# EAGLE board ESP32Avio (EAGLE 9.6.2)
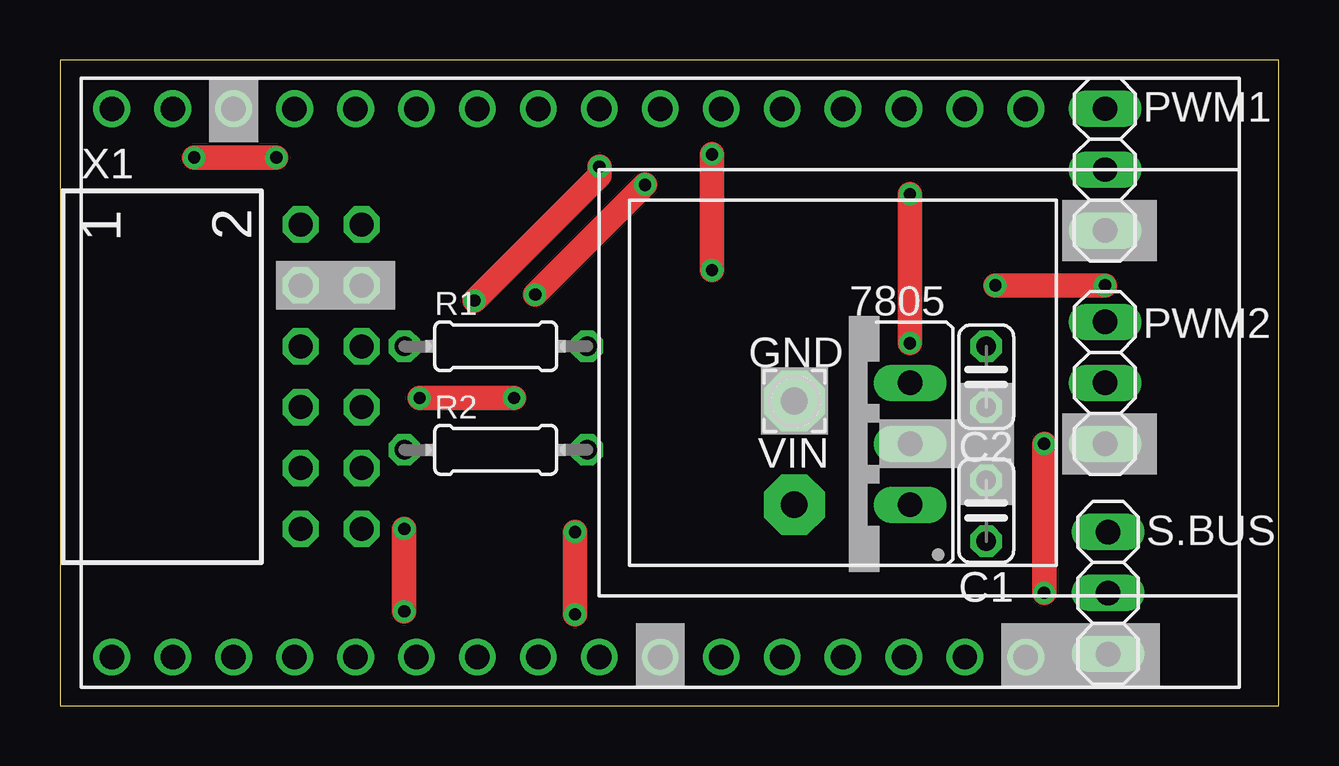
[diagram p0: board, top side]
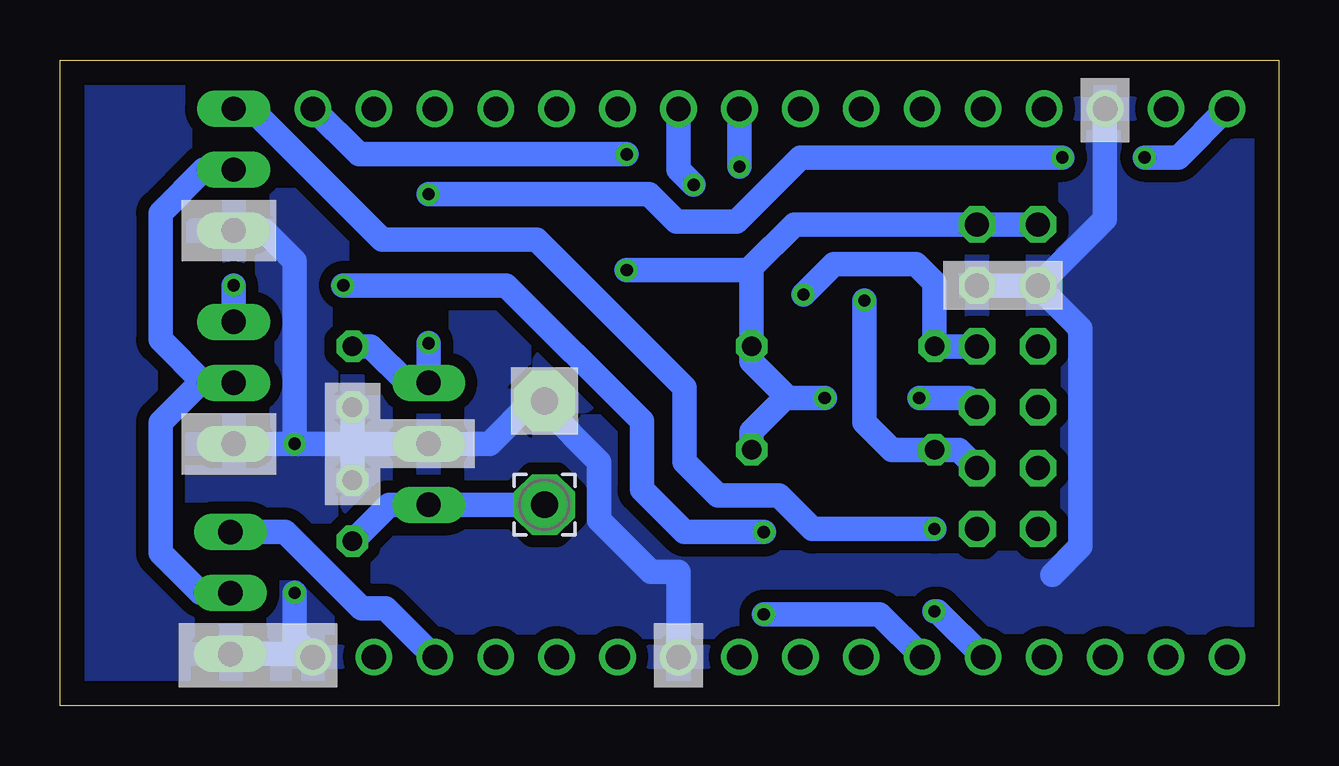
[diagram p1: board, bottom side, seen from below]

Size 50.8 x 26.92 mm. Coordinates in mm from the lower left corner, seen from the top.
Outline: 0,0 50.8,0 50.8,26.92 0,26.92 0,0
Copper layers (1*16): Top 0.035mm / dielectric 1.5mm / Bottom 0.035mm
Design rules "default": minimum track width 6mil, minimum drill 0.35mm, track to track 6mil, track to pad 6mil, pad to pad 6mil, via to via 6mil, smd to smd 6mil, copper to edge 40mil, drill to drill 6mil, minimum pad ring 10mil, minimum via ring 8mil, stop-mask expansion 4mil, vias tented up to drill 0mil, thermal gap 10mil
Net classes: 0 default: width 1.016 mm, drill 0.508 mm, clearance 0.508 mm; 1 POWER: width 1.016 mm, drill 0.508 mm, clearance 0.508 mm

## Footprints (pad centres in the part's own frame; a part is rotated, then mirrored left to right if it is on the bottom)
78XXS = drill 1.016 long: GND 0,-2.54; IN -2.54,-2.54; OUT 2.54,-2.54
C025-024X044 = drill 0.813 octagon: 1 -1.27,0; 2 1.27,0
2,54/1,1 = drill 1.118 pad 2.54 octagon: 1 0,0
1X03 = drill 1.016 long: 1 -2.54,0; 2 0,0; 3 2.54,0
0204/7 = drill 0.813 octagon: 1 -3.81,0; 2 3.81,0
AE-ESP32-WROOM-32E-MINI = drill 1.02: P$1 19.05,11.43; P$2 16.51,11.43; P$3 13.97,11.43; P$4 11.43,11.43; P$5 8.89,11.43; P$6 6.35,11.43; P$7 3.81,11.43; P$8 1.27,11.43; P$9 -1.27,11.43; P$10 -3.81,11.43; P$11 -6.35,11.43; P$12 -8.89,11.43; P$13 -11.43,11.43; P$14 -13.97,11.43; P$15 -16.51,11.43; P$16 -19.05,11.43; P$17 19.05,-11.43; P$18 16.51,-11.43; P$19 13.97,-11.43; P$20 11.43,-11.43; P$21 8.89,-11.43; P$22 6.35,-11.43; P$23 3.81,-11.43; P$24 1.27,-11.43; P$25 -1.27,-11.43; P$26 -3.81,-11.43; P$27 -6.35,-11.43; P$28 -8.89,-11.43; P$29 -11.43,-11.43; P$30 -13.97,-11.43; P$31 -16.51,-11.43; P$32 -19.05,-11.43
SSW-106-02-G-D-RA = drill 1 pad 1.5 octagon: 1 -6.35,1.524; 2 -6.35,4.064; 3 -3.81,1.524; 4 -3.81,4.064; 5 -1.27,1.524; 6 -1.27,4.064; 7 1.27,1.524; 8 1.27,4.064; 9 3.81,1.524; 10 3.81,4.064; 11 6.35,1.524; 12 6.35,4.064

## Placement (x,y rotation side)
7805  [78XXS]  32.89,10.92 90 top
C1  0.33uF  [C025-024X044]  38.61,8.13 90 top
C2  0.1uF  [C025-024X044]  38.61,13.72 270 top
GND  [2,54/1,1]  30.61,12.7 0 top
PWM1  [1X03]  43.56,22.35 270 top
PWM2  [1X03]  43.56,13.46 270 top
R1  10kΩ  [0204/7]  18.16,14.99 0 top
R2  10kΩ  [0204/7]  18.16,10.67 0 top
S.BUS  [1X03]  43.69,4.7 270 top
U$1  AE-ESP32-WROOM-32E-MINI  [AE-ESP32-WROOM-32E-MINI]  21.21,13.46 0 top
VIN  [2,54/1,1]  30.61,8.38 0 bottom
X1  SSW-106-02-G-D-RA  [SSW-106-02-G-D-RA]  8.51,13.72 270 top

## Library data of the parts
7805 = v-reg
C1 C2 = rcl; SPICEPREFIX: C
GND VIN = wirepad
PWM1 PWM2 S.BUS = pinhead
R1 R2 = rcl; SPICEPREFIX: R
U$1 = ESP32-WROOM-32E-akizuki
X1 = con-samtec; MF: Samtec Inc.; MPN: SSW-106-02-G-D-RA; OC_FARNELL: unknown; OC_NEWARK: 11P9415

## Nets
+3V3 [POWER]: R1.2 R2.2 U$1.P$1 X1.1 X1.2 X1.8
+5V [POWER]: 7805.OUT C2.1 U$1.P$16
+5V5 [POWER]: PWM1.2 PWM2.2 S.BUS.2
GND [POWER]: 7805.GND C1.2 C2.2 GND.1 PWM1.3 PWM2.3 S.BUS.3 U$1.P$14 U$1.P$17 U$1.P$23 X1.3 X1.4
N$1 [POWER]: 7805.IN C1.1 VIN.1
PWM1: PWM1.1 U$1.P$28
PWM2: PWM2.1 U$1.P$27
S.BUS: S.BUS.1 U$1.P$19
SCL: R1.1 U$1.P$7 X1.6
SDA: R2.1 U$1.P$8 X1.10

## Tracks (layer width: path | path; a pad name or v marks a point on that pad's centre or on a via)
+3V3  (via drill 0.51)
  Top 1.016: v27.18,18.16 v27.18,22.99 | v18.92,12.83 v14.99,12.83
  Bottom 1.016: X1.1 X1.2 20.19,20.07 21.97,18.29 | U$1.P$1 40.24,24.89 38.33,22.99 v27.18,22.99 | 21.97,18.29 22.1,18.16 v27.18,18.16 | 20.45,12.83 21.97,14.35 R1.2 21.97,18.29 | 20.45,12.83 19.81,12.83 v18.92,12.83 | R2.2 21.97,11.43 20.57,12.83 20.45,12.83 | v14.99,12.83 12.95,12.83 X1.8
+5V  (via drill 0.51)
  Top 1.016: v35.43,21.34 v35.43,15.11 | v9.02,22.86 v5.59,22.86
  Bottom 1.016: C2.1 37.85,14.99 36.3,13.44 36.26,13.46 7805.OUT v35.43,15.11 | v35.43,21.34 26.24,21.34 25.1,20.19 22.61,20.19 19.94,22.86 v9.02,22.86 | v5.59,22.86 4.19,22.86 U$1.P$16
+5V5
  Bottom 1.016: S.BUS.2 44.93,4.7 46.61,6.38 46.61,11.81 44.96,13.46 PWM2.2 44.8,13.46 46.61,15.27 46.61,20.55 44.8,22.35 PWM1.2
GND  (via drill 0.51)
  Top 1.016: v41.02,4.7 v41.02,10.92
  Bottom 1.016: v41.02,4.7 41.02,2.79 U$1.P$17 40.39,2.16 S.BUS.3 | PWM1.3 42.29,19.81 41.02,18.54 v41.02,10.92 | X1.4 X1.3 10.03,17.49 | 9.44,5.46 8.26,6.63 8.26,15.72 10.03,17.49 | U$1.P$23 25.02,5.46 25.02,5.59 26.16,5.59 28.32,7.75 28.32,10.16 30.61,12.45 GND.1 31.11,12.7 32.89,10.92 7805.GND 38.73,10.92 | 10.03,17.49 7.24,20.28 U$1.P$14 | 38.73,10.92 v41.02,10.92 | v41.02,10.92 PWM2.3 | C1.2 38.61,10.79 | 38.61,10.79 38.73,10.92 | 38.61,10.79 C2.2
  pour Bottom: 0,26.92 50.8,26.92 50.8,0 0,0
N$1
  Bottom 1.016: VIN.1 7805.IN 37.08,8.38 C1.1
PWM1  (via drill 0.51)
  Top 1.016: v14.35,7.37 v14.34,7.37 v14.34,3.94 v14.35,3.94
  Bottom 1.016: PWM1.1 42.83,24.89 37.36,19.43 30.93,19.43 24.77,13.26 24.77,10.16 23.37,8.76 20.83,8.76 19.43,7.37 v14.35,7.37 | U$1.P$28 14.22,3.94 v14.35,3.94
PWM2  (via drill 0.51)
  Top 1.016: v43.56,17.53 v38.99,17.53 | v21.46,7.24 v21.46,3.81
  Bottom 1.016: v43.56,17.53 PWM2.1 | v38.99,17.53 32.2,17.53 26.54,11.87 26.54,9.02 24.77,7.24 v21.46,7.24 | v21.46,3.81 20.68,3.81 16.64,3.81 U$1.P$27
S.BUS
  Bottom 1.016: U$1.P$19 35.2,2.03 37.23,4.07 38.23,4.07 41.41,7.24 S.BUS.1
SCL  (via drill 0.51)
  Top 1.016: v24.38,21.72 v19.81,17.14
  Bottom 1.016: X1.6 R1.1 14.35,17.65 15.11,18.41 18.54,18.41 v19.81,17.14 | U$1.P$7 25.02,22.35 v24.38,21.72
SDA  (via drill 0.51)
  Top 1.016: v22.48,22.48 22.48,22.1 v17.28,16.89 v17.27,16.89
  Bottom 1.016: X1.10 13.34,10.67 R2.1 16.12,10.67 17.27,11.81 v17.27,16.89 | v22.48,22.48 U$1.P$8